# Altium PCB proto_board.PcbDoc
Units mm, origin at the board's own origin, x right, y up, seen from the top; angles counter-clockwise.
Board outline 23.75 x 27.05 mm, 2 copper layers (Top Layer, Bottom Layer); 6 components, 12 nets, 46 pads, 8 vias.
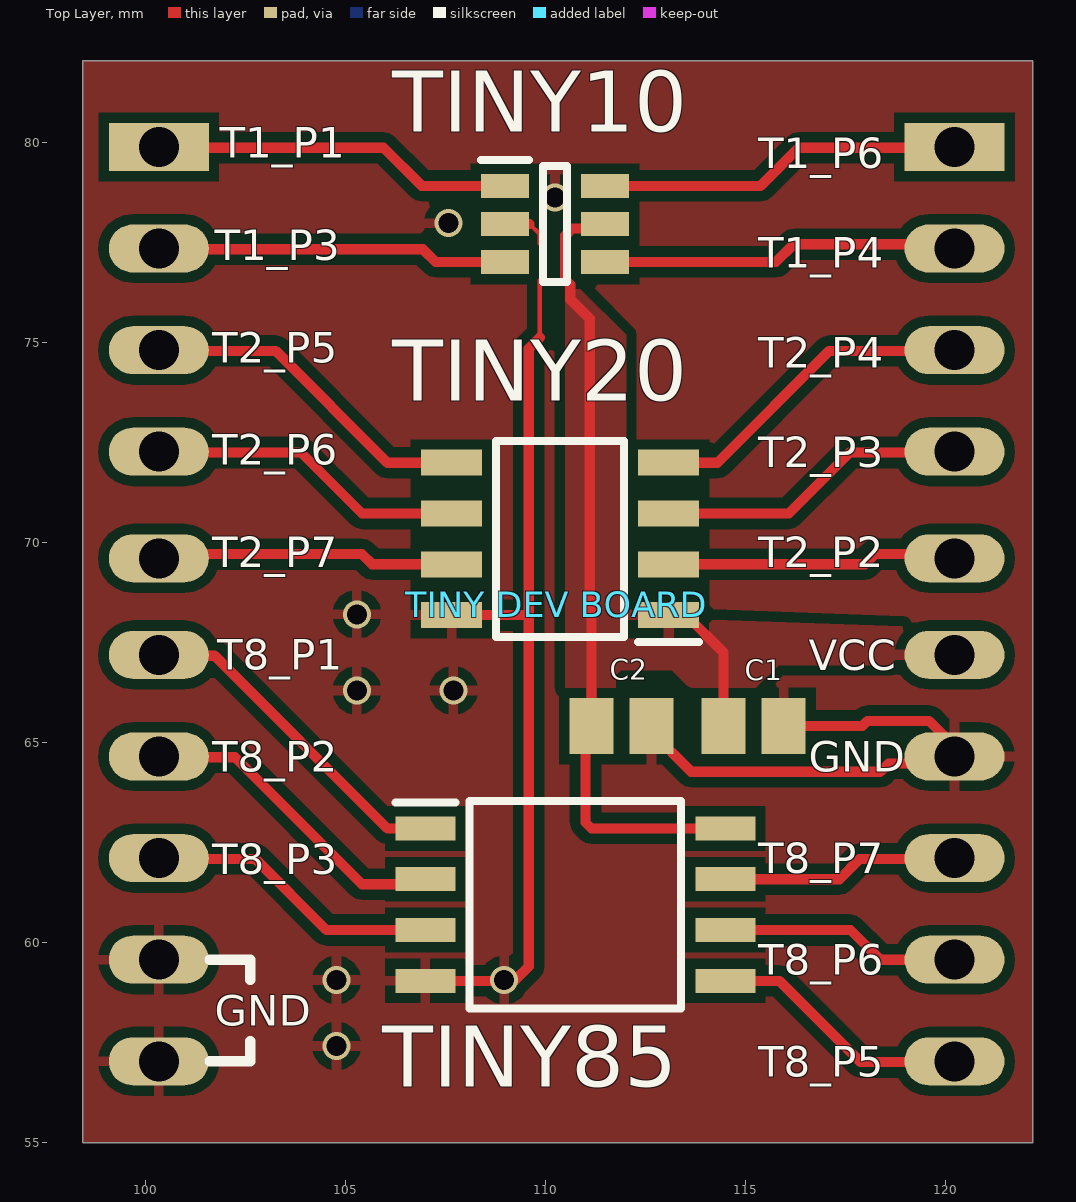
[diagram p0: Top Layer view]
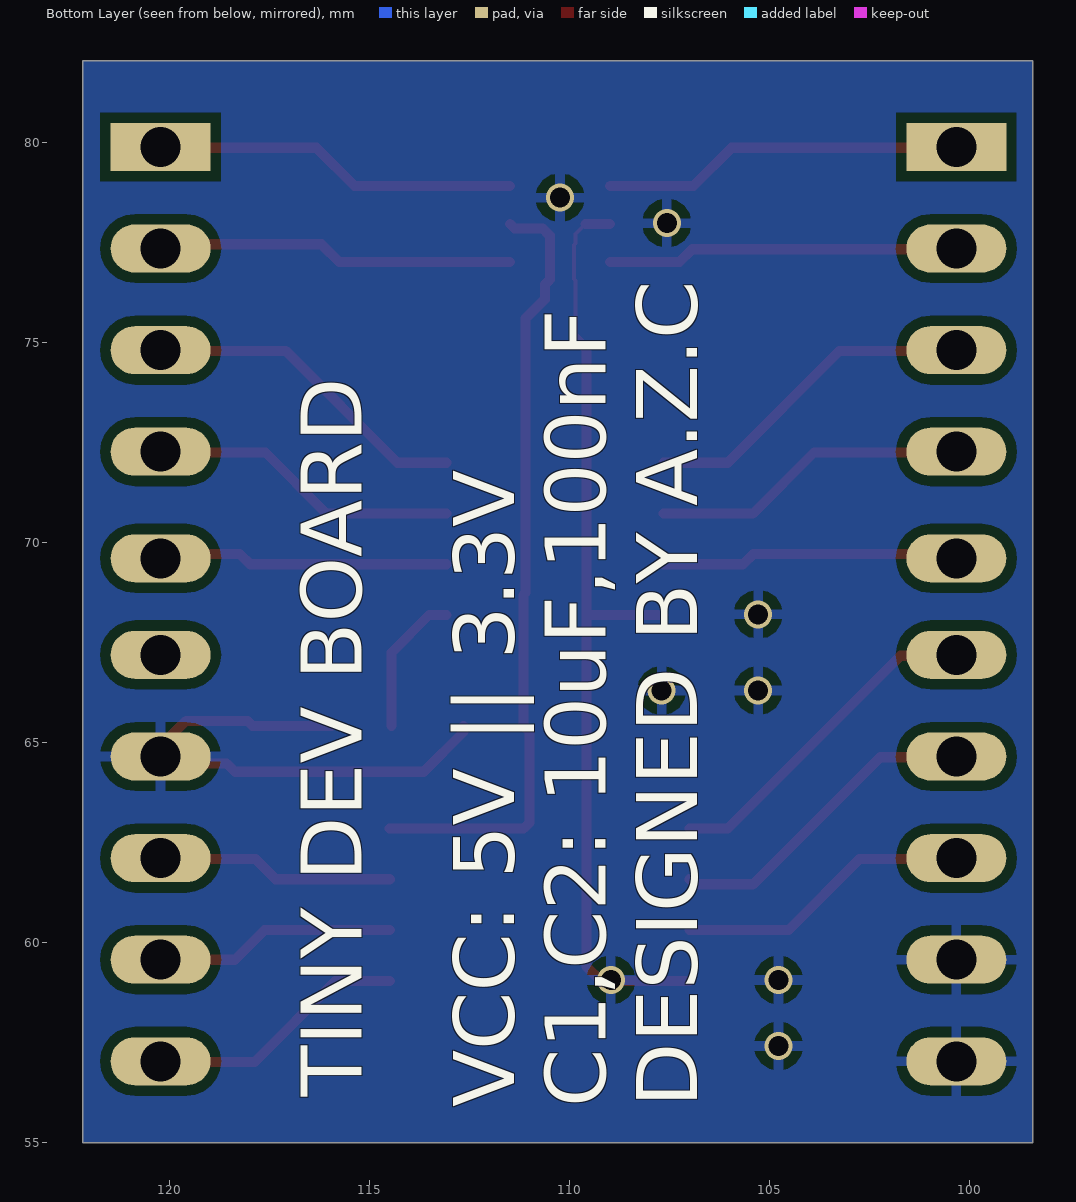
[diagram p1: Bottom Layer view, seen from below]

## Layer stack, top to bottom
Top Solder: solder mask 0.0102, Solder Resist, Dk 3.5
Top Layer: signal copper 0.0356
Dielectric 1: dielectric 0.32, FR-4, Dk 4.8
Bottom Layer: signal copper 0.0356
Bottom Solder: solder mask 0.0102, Solder Resist, Dk 3.5

## Board outline
98.425,54.991 122.174,54.991 122.174,82.042 98.425,82.042

## Design rules (kind name [scope] priority, off if disabled: settings)
Clearance [All] p1: gap=0.254 ignorepadtopadclearanceinfootprint=FALSE except(0: Arc-Hole Track-Hole SMDPad-Hole THPad-Hole Via-Hole Fill-Hole Poly-Hole Region-Hole Text-Hole)
PolygonConnect [All] p1: connectstyle=Relief reliefconductorwidth=0.254 reliefentries=4 polygonreliefangle="90 Angle" airgapwidth=0.254
RoomDefinition MCU [InComponentClass('MCU')] p1: confinementstyle=ConfineIn formatcopy=TRUE lockcomponents=FALSE outline 178.943,26.924 198.12,26.924 198.12,37.338 178.943,37.338
RoutingVias [All] p1: holewidth=0.711 width=1.27 viastyle="Through Hole" minholewidth=0.711 minwidth=1.27 maxholewidth=0.711 maxwidth=1.27
SolderMaskExpansion [All] p1: expansion=0.102 istentingtop=FALSE
Width [All] p1: maxlimit=0.254 minlimit=0.254 preferedwidth=0.254
30 further rules are at their usual default settings.

## Classes and differential pairs
component class MCU: C1 TINY10 TINY20 TINY85

## Components (designator, comment, footprint, x,y, rotation, side; value= is the part's Value field where it differs from the comment)
C1 "Cap Pol3" C0805 115.201,65.405 r0 top value=100pF (schematic designator C?)
C2 "Cap Pol3" C0805 111.899,65.405 r0 top value=100pF (schematic designator C?)
TINY10 "ATTINY10-TSHR" SOT95P280X145-6N 110.236,77.958 r0 top locked
TINY20 "ATTINY202-SSNR" SOIC127P600X175-8N 110.363,70.084 r180 top locked
TINY85 "ATTINY85-20SU" SOT127P798X216-8N 110.744,60.94 r0 top locked (schematic designator IC?)
"TINY DEV BOARD" "Comment" PIN_HEADER 100.203,79.629 r0 top locked

## Footprints (in the part's own frame and the unit in brackets; to place one, negate y for a bottom-side part, rotate by r counter-clockwise, add the part's x,y. Pads: shape width x height; smd on the part's side, far side on the other; paste and mask are expansions set on the pad)
C0805 [mm] "Chip Capacitor, Body 2.0x1.3mm, IPC High Density"
  rect 1.1x1.4 smd: 1(-0.75,0) 2(0.75,0)
  body extent -1.1,-0.72 1.1,0.72, height 1.4
PIN_HEADER [mm]
  rect 2.5x1.2 hole 1: 1(0.127,0.254) 1(20.021,0.254)
  oval 2.5x1.2 hole 1: 2(0.127,-2.286) 2(20.021,-2.286) 3(0.127,-4.826) 3(20.021,-4.826) 4(0.127,-7.366) 4(20.021,-7.366) 5(0.127,-10.033) 5(20.021,-10.033) 6(0.127,-12.446) 6(20.021,-12.446) 7(0.127,-14.986) 7(20.021,-14.986) 8(0.127,-17.526) 8(20.021,-17.526) 9(0.127,-20.066) 9(20.021,-20.066) 10(0.127,-22.606) 10(20.021,-22.606)
  body extent -1.22,-23.88 21.21,1.52, height 8.15
SOIC127P600X175-8N [mm]
  rect 1.525x0.65 smd: 1(-2.712,1.905) 2(-2.712,0.635) 3(-2.712,-0.635) 4(-2.712,-1.905) 5(2.712,-1.905) 6(2.712,-0.635) 7(2.712,0.635) 8(2.712,1.905)
  silkscreen extent -3.47,-2.45 1.6,2.58, body extent -3,-2.45 3,2.45, height 1.75
SOT95P280X145-6N [mm]
  rect 1.2x0.6 smd: 1(-1.25,0.95) 2(-1.25,0) 3(-1.25,-0.95) 4(1.25,-0.95) 5(1.25,0) 6(1.25,0.95)
  silkscreen extent -1.85,-1.45 0.3,1.6, body extent -1.4,-1.45 1.4,1.45, height 1.45
SOT127P798X216-8N [mm]
  rect 1.5x0.6 smd: 1(-3.75,1.905) 2(-3.75,0.635) 3(-3.75,-0.635) 4(-3.75,-1.905) 5(3.75,-1.905) 6(3.75,-0.635) 7(3.75,0.635) 8(3.75,1.905)
  silkscreen extent -4.5,-2.6 2.65,2.6, body extent -3.99,-2.6 3.99,2.6, height 2.16

## Part data
C1 C2: "Polarized Capacitor (Surface Mount)", LatestRevisionDate=29-May-2009, LatestRevisionNote="IPC-7351 Footprint Added.", PackageDescription="Chip Capacitor", PackageReference=C0805, Published=8-Jun-2000, Publisher="Altium Limited"
TINY10: "Integrated Circuit", Manufacturer_Name=Microchip, Mouser Part Number=556-ATTINY10-TSHR, RS Part Number=1330946P, Datasheet Link=http://www.atmel.com/images/atmel-8127-avr-8-bit-microcontroller-attiny4-attiny5-attiny9-attiny10_datasheet.pdf, Height=1.45mm, Manufacturer_Part_Number=ATTINY10-TSHR, Mouser Price/Stock=https://www.mouser.co.uk/ProductDetail/Microchip-Technology-Atmel/ATTINY10-TSHR?qs=3unH%2FDqlvl%2FoduNsVj6acA%3D%3D, RS Price/Stock=http://uk.rs-online.com/web/p/products/1330946P
TINY20: "Integrated Circuit", Manufacturer_Name=Microchip, Mouser Part Number=579-ATTINY202-SSNR, Datasheet Link=http://ww1.microchip.com/downloads/en/DeviceDoc/ATtiny202-402-AVR-MCU-with-Core-Independent-Peripherals_and-picoPower-40001969A.pdf, Height=1.75mm, Manufacturer_Part_Number=ATTINY202-SSNR, Mouser Price/Stock=https://www.mouser.co.uk/ProductDetail/Microchip-Technology/ATTINY202-SSNR?qs=y6ZabgHbY%252Bx90fzudZ0SuA%3D%3D
TINY85: "Integrated Circuit", Manufacturer_Name=Microchip, Mouser Part Number=556-ATTINY85-20SU, RS Part Number=6962639P, Datasheet Link=https://componentsearchengine.com/Datasheets/2/ATTINY85-20SU.pdf, Height=2.16mm, Manufacturer_Part_Number=ATTINY85-20SU, Mouser Price/Stock=https://www.mouser.co.uk/ProductDetail/Microchip-Technology-Atmel/ATTINY85-20SU?qs=8jWQYweyg6N%2FGXnwAe4Icw%3D%3D, RS Price/Stock=http://uk.rs-online.com/web/p/products/6962639P

## Via types
v1: diameter 0.7, hole 0.5, Top Layer to Bottom Layer, 8 vias

## Nets (pads, with @x,y where several pads share a name; then routed paths per layer and width w, separated by ;. In a path a pad name is that pad's centre, name@x,y a point inside that pad or via, vN(x,y) a via of type N, cw(c..) or ccw(c..) an arc to the next point about the centre after c; other vN are vias at no path point)
GND: "TINY DEV BOARD.7"@120.224,64.643 "TINY DEV BOARD.9"@100.33,59.563 "TINY DEV BOARD.10"@100.33,57.023 C1.2 C2.2 TINY10.2 TINY20.8 TINY85.4 | length 37.3
  Top Layer w0.102: 109.601,77.958 109.855,77.704 109.855,77.47 109.891,77.434 109.891,76.582 109.855,76.546 109.855,75.116
  Top Layer w0.254: TINY85.4 109.22,59.035 109.579,59.394 109.579,68.179 ; TINY20.8 109.579,68.179 ; TINY10.2 109.601,77.958 ; 109.855,75.116 109.579,74.84 109.579,68.179 ; C2.2 112.649,65.255 113.642,64.262 118.364,64.262 118.572,64.47 120.136,64.47 120.289,64.623 120.289,64.833 119.59,65.532 118.046,65.532 117.919,65.405 C1.2
  other v1: 104.775,57.404 104.775,59.055 108.966,59.055 105.283,66.294 107.696,66.294 105.283,68.199 107.569,77.978 110.236,78.613
T1_P1: TINY10.1
T1_P3: TINY10.3
T1_P4: TINY10.4
T1_P6: TINY10.6
T8_P1: TINY85.1
T8_P2: TINY85.2
T8_P3: TINY85.3
T8_P5: TINY85.5 | length 6.6
  Top Layer w0.254: TINY85.5 115.844,59.035 117.876,57.003 120.203,57.003
T8_P6: TINY85.6 | length 6
  Top Layer w0.254: TINY85.6 117.622,60.305 118.364,59.563 120.183,59.563 120.203,59.543
T8_P7: TINY85.7
VCC: "TINY DEV BOARD.6"@120.224,67.183 C1.1 C2.1 TINY10.5 TINY20.1 TINY85.8 | length 23.3
  Top Layer w0.254: TINY10.5 111.372,77.844 110.669,77.844 110.49,77.666 110.49,76.565 110.617,76.438 110.617,76.073 111.103,75.587 111.103,68.729 111.149,68.683 C2.1 110.998,65.254 110.998,62.994 111.147,62.845 TINY85.8 ; TINY20.1 113.513,68.179 114.451,67.24 C1.1
pads on no net: "TINY DEV BOARD.1" "TINY DEV BOARD.2" "TINY DEV BOARD.3" "TINY DEV BOARD.4" "TINY DEV BOARD.5" "TINY DEV BOARD.6"@100.33,67.183 "TINY DEV BOARD.7"@100.33,64.643 "TINY DEV BOARD.8" "TINY DEV BOARD.9"@120.224,59.563 "TINY DEV BOARD.10"@120.224,57.023 TINY20.2 TINY20.3 TINY20.4 TINY20.5 TINY20.6 TINY20.7
copper on no net: | length 114.2
  Top Layer w0.254: 100.203,62.083 102.743,62.083 104.521,60.305 106.994,60.305 ; 100.203,64.623 102.235,64.623 105.41,61.448 106.867,61.448 106.994,61.575 ; 100.203,67.163 101.727,67.163 106.045,62.845 106.994,62.845 ; 100.203,69.703 105.41,69.703 105.664,69.449 107.651,69.449 ; 100.203,72.243 103.886,72.243 105.41,70.719 107.651,70.719 ; 100.203,74.783 103.251,74.783 106.045,71.989 107.651,71.989 ; 100.203,77.323 106.934,77.323 107.249,77.008 108.986,77.008 ; 100.203,79.863 105.947,79.863 106.902,78.908 108.986,78.908 ; 111.486,77.008 115.763,77.008 116.205,77.45 120.076,77.45 ; 111.486,78.908 115.377,78.908 116.332,79.863 120.203,79.863 ; 113.075,69.449 117.983,69.449 118.237,69.703 120.203,69.703 ; 113.075,70.719 116.078,70.719 117.602,72.243 120.203,72.243 ; 113.075,71.989 114.3,71.989 117.094,74.783 120.203,74.783 ; 114.494,61.575 117.348,61.575 117.856,62.083 120.203,62.083 ; 119.38,65.024 119.781,64.623

## Polygon pours and split planes (outlines as drawn)
GND on Top Layer "GND_L01_P011" (solid, remove dead copper, pour order 11): 122.174,54.991 122.174,82.042 98.425,82.042 98.425,54.991
no net on Top Layer "NONET_L01_P008" (solid, pour order 8): 121.92,55.88
VCC on Top Layer "VCC_L01_P004" (solid, pour order 4): 113.919,68.072 113.919,68.58 110.49,68.58 110.49,64.516 111.76,64.516 111.76,66.675 111.887,66.802 113.157,66.802 113.792,66.167 115.062,66.167 115.824,66.929 118.745,66.929 119.253,66.421 121.285,66.421 121.666,66.802 121.666,67.564 121.285,67.818 121.158,67.818
no net on Top Layer "NONET_L01_P006" (solid, pour order 6): 121.92,55.88
VCC on Top Layer "VCC_L01_P002" (solid, remove dead copper, pour order 2): 112.059,68.453 112.014,68.498 112.014,75.184 110.871,76.327 110.49,76.327 110.49,68.498 111.125,68.453
GND on Bottom Layer "GND_L02_P009" (solid, remove dead copper, pour order 9): 122.174,54.991 122.174,82.042 98.425,82.042 98.425,54.991

## Silkscreen, mask and mechanical layers (free items; w line width, h text height)
Top Overlay:
  lines w0.254: 101.6,57.023 102.616,57.023 ; 101.6,59.563 102.616,59.563 102.616,59.055 ; 102.362,57.023 102.616,57.023 ; 102.616,57.531 102.616,57.023
  text "T1_P1" at 101.854,79.609 h0.76
  text "T1_P6" at 115.316,79.355 h0.76
  text "T1_P3" at 101.727,77.051 h0.76
  text "T1_P4" at 115.316,76.859 h0.76
  text "T2_P5" at 101.663,74.493 h0.76
  text "T2_P4" at 115.316,74.364 h0.76
  text "T2_P6" at 101.663,71.934 h0.76
  text "T2_P3" at 115.316,71.869 h0.76
  text "T2_P7" at 101.663,69.376 h0.76
  text "T2_P2" at 115.316,69.373 h0.76
  text "T8_P1" at 101.79,66.818 h0.76
  text "VCC" at 116.586,66.802 h0.76
  text "T8_P2" at 101.663,64.26 h0.76
  text "GND" at 116.586,64.262 h0.76
  text "T8_P7" at 115.316,61.722 h0.76
  text "T8_P3" at 101.663,61.702 h0.76
  text "T8_P6" at 115.316,59.182 h0.76
  text "GND" at 101.727,57.912 h0.76
  text "T8_P5" at 115.316,56.642 h0.76
Bottom Overlay:
  text "VCC: 5V || 3.3V / C1,C2: 10uF,100nF / DESIGNED BY A.Z.C" at 106.807,55.88 h1.52 r270
Mechanical 1:
  lines w0.254: 98.425,55.118 98.425,82.042 122.174,82.042 122.174,54.991 122.047,55.118 98.425,55.118